# EAGLE board cam&sram&acc (EAGLE 5.12)
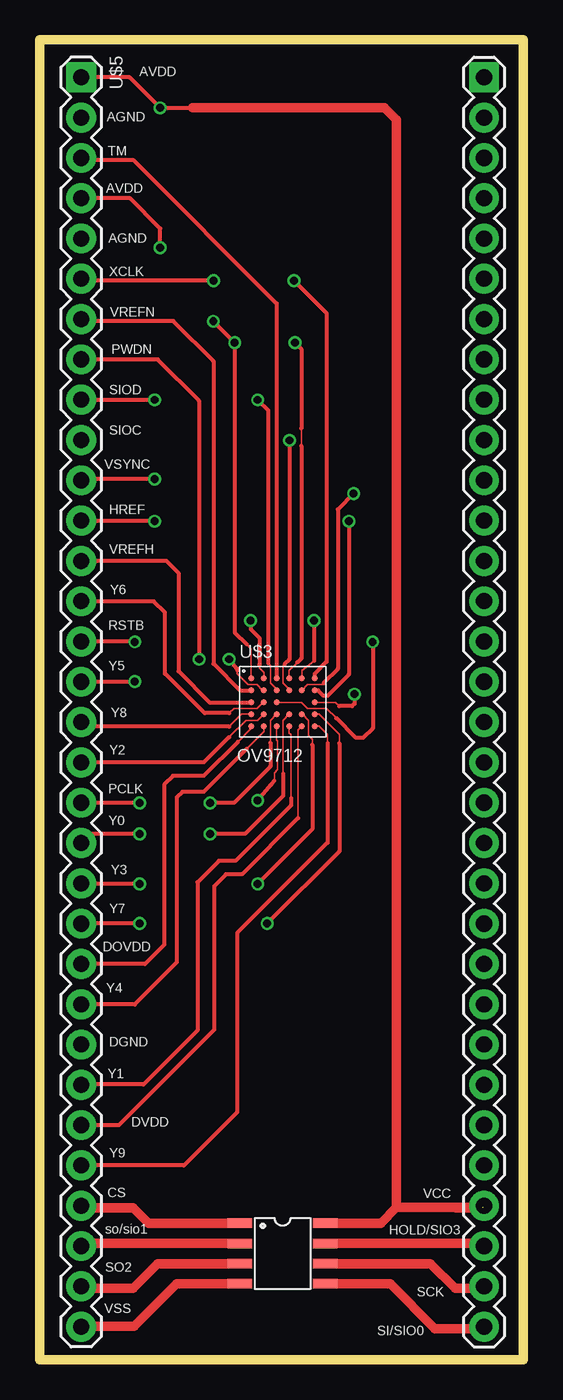
[diagram p0: board, top side]
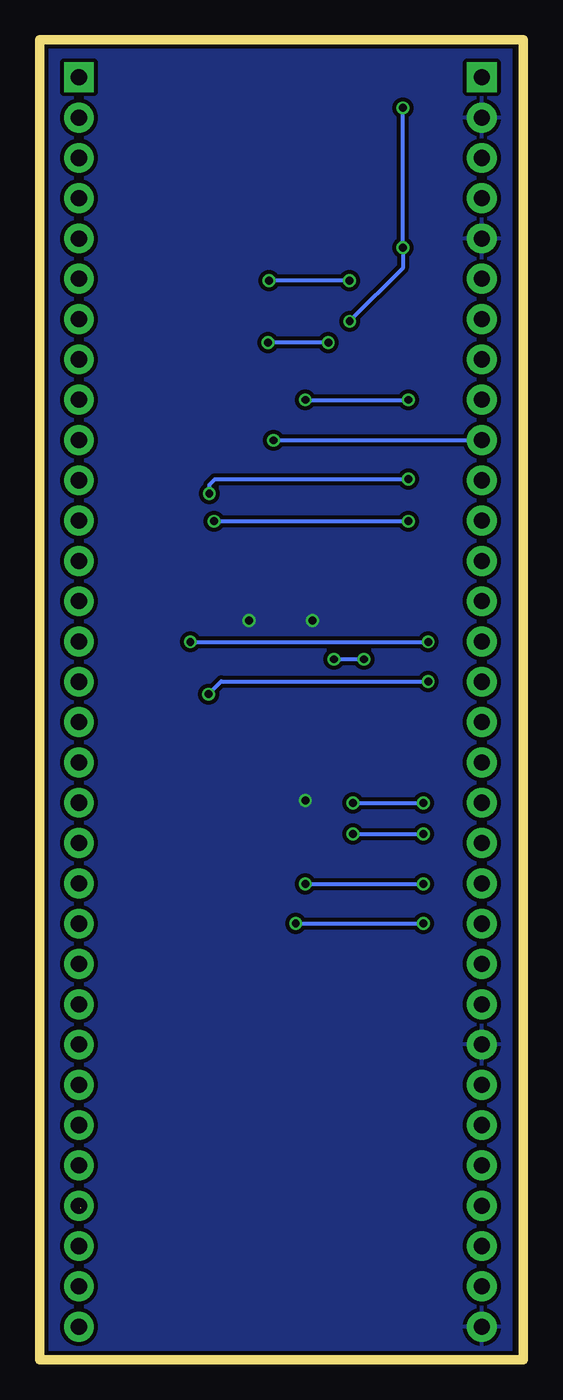
[diagram p1: board, bottom side, seen from below]

Size 30.5 x 83.2 mm. Coordinates in mm from the lower left corner, seen from the top.
Outline: 0,83.2 30.5,83.2 30.5,0 0,0 0,83.2
Copper layers (1*16): Top 0.035mm / dielectric 1.5mm / Bottom 0.035mm
Design rules "SeeedStudio_2layer_DRU_no_angle_20140221": minimum track width 6mil, minimum drill 12mil, track to track 6mil, track to pad 6mil, pad to pad 6mil, via to via 6mil, smd to smd 0mil, copper to edge 10mil, drill to drill 10mil, minimum pad ring 10mil, minimum via ring 6mil, stop-mask expansion 2mil, vias tented up to drill 100mil, thermal gap 10mil

## Footprints (pad centres in the part's own frame; a part is rotated, then mirrored left to right if it is on the bottom)
OV9712 = smd 0.38 x 0.38: A1 -1.982,1.482; A2 -1.182,1.482; A3 -0.382,1.482; A4 0.418,1.482; A5 1.218,1.482; A6 2.018,1.482; B1 -1.982,0.732; B2 -1.182,0.732; B3 -0.382,0.732; B4 0.418,0.732; B5 1.218,0.732; B6 2.018,0.732; C1 -1.982,-0.018; C2 -1.182,-0.018; C3 -0.382,-0.018; C6 2.018,-0.018; D1 -1.982,-0.768; D2 -1.182,-0.768; D3 -0.382,-0.768; D4 0.418,-0.768; D5 1.218,-0.768; D6 2.018,-0.768; E1 -1.982,-1.518; E2 -1.182,-1.518; E3 -0.382,-1.518; E4 0.418,-1.518; E5 1.218,-1.518; E6 2.018,-1.518
23LC512PKG = smd 0.6 x 1.55: 1 -1.905,-2.7; 2 -0.635,-2.7; 3 0.635,-2.7; 4 1.905,-2.7; 5 1.905,2.7; 6 0.635,2.7; 7 -0.635,2.7; 8 -1.905,2.7
2X32 = drill 1.016 pad 1.88 square: 1 -12.7,39.37; 64 12.7,39.37 | drill 1.016 pad 1.88 round: 2 -12.7,36.83; 3 -12.7,34.29; 4 -12.7,31.75; 5 -12.7,29.21; 6 -12.7,26.67; 7 -12.7,24.13; 8 -12.7,21.59; 9 -12.7,19.05; 10 -12.7,16.51; 11 -12.7,13.97; 12 -12.7,11.43; 13 -12.7,8.89; 14 -12.7,6.35; 15 -12.7,3.81; 16 -12.7,1.27; 17 -12.7,-1.27; 18 -12.7,-3.81; 19 -12.7,-6.35; 20 -12.7,-8.89; 21 -12.7,-11.43; 22 -12.7,-13.97; 23 -12.7,-16.51; 24 -12.7,-19.05; 25 -12.7,-21.59; 26 -12.7,-24.13; 27 -12.7,-26.67; 28 -12.7,-29.21; 29 -12.7,-31.75; 30 -12.7,-34.29; 31 -12.7,-36.83; 32 -12.7,-39.37; 33 12.7,-39.37; 34 12.7,-36.83; 35 12.7,-34.29; 36 12.7,-31.75; 37 12.7,-29.21; 38 12.7,-26.67; 39 12.7,-24.13; 40 12.7,-21.59; 41 12.7,-19.05; 42 12.7,-16.51; 43 12.7,-13.97; 44 12.7,-11.43; 45 12.7,-8.89; 46 12.7,-6.35; 47 12.7,-3.81; 48 12.7,-1.27; 49 12.7,1.27; 50 12.7,3.81; 51 12.7,6.35; 52 12.7,8.89; 53 12.7,11.43; 54 12.7,13.97; 55 12.7,16.51; 56 12.7,19.05; 57 12.7,21.59; 58 12.7,24.13; 59 12.7,26.67; 60 12.7,29.21; 61 12.7,31.75; 62 12.7,34.29; 63 12.7,36.83

## Placement (x,y rotation side)
U$3  OV9712  [OV9712]  15.32,41.46 0 top
U$4  23LC512  [23LC512PKG]  15.32,6.7 270 top
U$5  2X32_HEADER  [2X32]  15.32,41.46 0 top

## Library data of the parts
U$3-U$5 = nurullah

## Nets
3.3V: U$3.A1 U$3.A4 U$4.8 U$5.1 U$5.4 U$5.36
GND: U$3.A2 U$3.A5 U$3.E3 U$4.4 U$5.2 U$5.5 U$5.25 U$5.32
N$33: U$3.A3 U$5.3
N$36: U$3.A6 U$5.6
N$37: U$3.B1 U$5.7
N$38: U$3.B2 U$5.8
N$39: U$3.B3 U$5.9
N$40: U$3.B4 U$5.10
N$41: U$3.B5 U$5.11
N$42: U$3.B6 U$5.12
N$43: U$3.C1 U$5.13
N$44: U$3.C2 U$5.14
N$45: U$3.C3 U$5.15
N$46: U$3.C6 U$5.16
N$47: U$3.D1 U$5.17
N$48: U$3.D2 U$5.18
N$49: U$3.D3 U$5.19
N$50: U$3.D4 U$5.20
N$51: U$3.D5 U$5.21
N$52: U$3.D6 U$5.22
N$53: U$3.E1 U$5.23
N$54: U$3.E2 U$5.24
N$56: U$3.E4 U$5.26
N$57: U$3.E5 U$5.27
N$58: U$3.E6 U$5.28
N$60: U$4.1 U$5.29
N$61: U$4.2 U$5.30
N$62: U$4.3 U$5.31
N$64: U$4.5 U$5.33
N$65: U$4.6 U$5.34
N$66: U$4.7 U$5.35

## Tracks (layer width: path | path; a pad name or v marks a point on that pad's centre or on a via)
3.3V  (via drill 0.5)  (1 unrouted)
  Top 0.1: U$3.A1 13.34,44.81 13.05,45.1 | U$3.A4 15.74,43.44 16.25,43.95 | 16.5,58.7 16.5,57.6
  Top 0.254: 13.05,45.1 12.3,45.85 v12.3,64.1 v10.95,65.45 | v7.6,70.1 7.6,71.3 5.7,73.2 U$5.4 | U$5.1 5.67,80.83 v7.6,78.9 9.65,78.9 | 16.25,43.95 16.5,44.2 16.5,57.6 | 16.5,58.7 16.5,63.7 v16.1,64.1
  Top 0.61: 26.2,9.59 27.9,9.59 U$5.36 | 28.05,9.7 27.95,9.6 22.5,9.6 | 9.65,78.9 21.75,78.9 22.5,78.15 22.5,9.6 | U$4.8 21.51,8.61 22.5,9.6
  Bottom 0.254: v10.95,65.45 7.6,68.8 v7.6,70.1 v7.6,78.9 | v12.3,64.1 v16.1,64.1
GND  (via drill 0.5)
  Top 0.1: U$3.A2 14.14,43.31 13.85,43.6 13.85,43.8 | U$3.E3 14.94,39.06 15,39 15,37.2 14.8,37 14.8,36.5 | U$3.A5 16.54,43.44 17.3,44.05
  Top 0.254: 13.85,43.8 13.85,45.5 13.3,46.05 v13.3,46.6 | v17.3,46.6 17.3,44.05 | 14.8,36.5 14.6,36.25 v13.75,35.25
  Top 0.61: U$4.4 8.64,4.79 5.95,2.1 U$5.32
  pour Bottom (isolate 0.254): 0.8,83.25 30.01,83.25 30.01,-0.57 0.8,-0.57
N$33
  Top 0.254: U$3.A3 14.94,66.57 5.88,75.63 2.74,75.63 U$5.3
N$36  (via drill 0.5)
  Top 0.254: v10.96,68.01 2.74,68.01 U$5.6 | U$3.A6 17.34,43.24 18.1,44 18.1,65.95 v16.04,68.01
  Bottom 0.254: v10.96,68.01 v16.04,68.01
N$37
  Top 0.254: U$3.B1 12.65,42.19 10.96,43.88 10.96,62.93 8.42,65.47 2.74,65.47 U$5.7
N$38  (via drill 0.5)
  Top 0.1: U$3.B2 14.06,42.19 13.7,42.55 13.15,42.55 12.45,43.25 12.45,43.45
  Top 0.254: 12.45,43.45 12.45,43.55 v11.95,44.15 | U$5.8 7.45,63.05 10.05,60.45 v10.05,44.15
  Bottom 0.254: v10.05,44.15 v11.95,44.15
N$39  (via drill 0.5)
  Top 0.1: U$3.B3 14.94,42.26 14.55,42.65 14.55,43.75 14.4,43.9
  Top 0.254: 14.4,43.9 14.4,59.85 v13.75,60.5 | v7.25,60.5 U$5.9
  Bottom 0.254: v13.75,60.5 v7.25,60.5
N$40  (via drill 0.5)
  Top 0.1: U$3.B4 15.74,42.26 15.35,42.65 15.35,43.75 15.45,43.85
  Top 0.254: 15.45,43.85 15.75,44.15 v15.75,57.95
  Bottom 0.254: v15.75,57.95 2.64,57.95 U$5.10
N$41  (via drill 0.5)
  Top 0.1: U$3.B5 16.9,42.55 17.8,42.55 17.9,42.65
  Top 0.254: v7.25,55.5 2.69,55.5 U$5.11 | 17.9,42.65 18.8,43.55 18.8,53.6 v19.8,54.6
  Bottom 0.254: v7.25,55.5 19.45,55.5 19.8,55.15 v19.8,54.6
N$42  (via drill 0.5)
  Top 0.254: U$3.B6 17.56,42.19 17.9,41.85 18.15,41.85 19.5,43.2 v19.5,52.85 | v7.25,52.85 2.66,52.85 U$5.12
  Bottom 0.254: v19.5,52.85 v7.25,52.85
N$43
  Top 0.254: U$3.C1 10.71,41.44 8.75,43.4 8.75,49.6 8,50.35 U$5.13
N$44
  Top 0.1: U$3.C2 14.09,41.44 13.7,41.05 12.25,41.05 11.95,40.75
  Top 0.254: 11.95,40.75 10.4,40.75 7.9,43.25 7.9,47.1 7.2,47.8 U$5.14
N$45  (via drill 0.5)
  Top 0.1: U$3.C3 16.51,41.44 16.9,41.05 18.1,41.05 18.7,40.45
  Top 0.254: U$5.15 5.98,45.27 v6,45.25 | v21,45.25 21,39.8 20.4,39.2 19.95,39.2 18.7,40.45
  Bottom 0.254: v21,45.25 v6,45.25
N$46  (via drill 0.5)
  Top 0.1: U$3.C6 18.66,41.44 18.9,41.2
  Top 0.254: U$5.16 5.98,42.73 v6,42.75 | v19.85,41.95 19.85,41.35 19.7,41.2 18.9,41.2
  Bottom 0.254: v6,42.75 19.05,42.75 v19.85,41.95
N$47
  Top 0.1: U$3.D1 12.74,40.69 11.95,39.9
  Top 0.254: 11.95,39.9 2.91,39.9 U$5.17
N$48
  Top 0.1: U$3.D2 13.75,40.3 13,40.3 11.95,39.25
  Top 0.254: 11.95,39.25 10.35,37.65 U$5.18
N$49  (via drill 0.5)
  Top 0.1: U$3.D3 14.55,40.3 14.55,38.9
  Top 0.254: v6.3,35.1 U$5.19 | 14.55,38.9 14.55,37.4 12.25,35.1 v10.75,35.1
  Bottom 0.254: v10.75,35.1 v6.3,35.1
N$50  (via drill 0.5)
  Top 0.1: U$3.D4 15.35,40.3 15.35,36.95
  Top 0.254: v6.3,33.15 3.2,33.15 U$5.20 | 15.35,36.95 15.35,35.55 12.95,33.15 v10.75,33.15
  Bottom 0.254: v10.75,33.15 v6.3,33.15
N$51  (via drill 0.5)
  Top 0.1: U$3.D5 16.56,40.69 16.95,40.3 16.95,39.35 17.2,39.1 17.2,38.75
  Top 0.254: 17.2,38.75 17.2,33.45 v13.75,30 | v6.3,30 2.65,30 U$5.21
  Bottom 0.254: v13.75,30 v6.3,30
N$52  (via drill 0.5)
  Top 0.1: U$3.D6 17.61,40.69 18.9,39.4 18.9,38.85
  Top 0.254: v6.3,27.5 U$5.22 | 18.9,38.85 18.9,32.05 v14.35,27.5
  Bottom 0.254: v14.35,27.5 v6.3,27.5
N$53
  Top 0.1: U$3.E1 13.34,39.79 12.5,38.95
  Top 0.254: 12.5,38.95 10.35,36.8 8.4,36.8 7.85,36.25 7.85,26.15 6.65,24.95 U$5.23
N$54
  Top 0.1: U$3.E2 14.14,39.59 13.05,38.5
  Top 0.254: 13.05,38.5 10.35,35.8 9,35.8 8.65,35.45 8.65,25.05 6,22.4 U$5.24
N$56
  Top 0.1: U$3.E4 15.74,39.51 15.85,39.4 15.85,35.4
  Top 0.254: 15.85,35.4 15.85,34.95 12.35,31.45 11.3,31.45 9.95,30.1 9.95,20.75 6.55,17.35 2.64,17.35 U$5.26
N$57
  Top 0.1: U$3.E5 16.3,39.7 16.3,34.15
  Top 0.254: U$5.27 4.99,14.79 11,20.8 11,29.85 11.75,30.6 12.75,30.6 16.3,34.15
N$58
  Top 0.1: U$3.E6 17.61,39.94 18.15,39.4 18.15,38.85
  Top 0.254: 18.15,38.85 18.15,32.6 12.45,26.9 12.45,15.6 9.1,12.25 U$5.28
N$60
  Top 0.61: U$4.1 6.86,8.61 5.88,9.59 2.74,9.59 U$5.29
N$61
  Top 0.61: U$4.2 2.78,7.33 U$5.30
N$62
  Top 0.61: U$4.3 7.44,6.07 5.88,4.51 2.74,4.51 U$5.31
N$64
  Top 0.61: U$4.5 22.1,4.79 24.93,1.97 27.9,1.97 U$5.33
N$65
  Top 0.61: U$4.6 24.65,6.07 26.2,4.51 27.9,4.51 U$5.34
N$66
  Top 0.61: U$4.7 27.85,7.33 U$5.35

## Text on the board
tPlace: AVDD | AGND | TM | AVDD | AGND | XCLK | VREFN | PWDN | SIOD | SIOC | VSYNC | HREF | VREFH | Y6 | RSTB | Y5 | Y8 | Y2 | PCLK | Y0 | Y3 | Y7 | DOVDD | Y4 | DGND | Y1 | DVDD | Y9 | CS | VCC | so/sio1 | HOLD/SIO3 | SO2 | SCK | VSS | SI/SIO0